# EAGLE board ADK_MEGA_2560-REV3 (EAGLE 7.3.0)
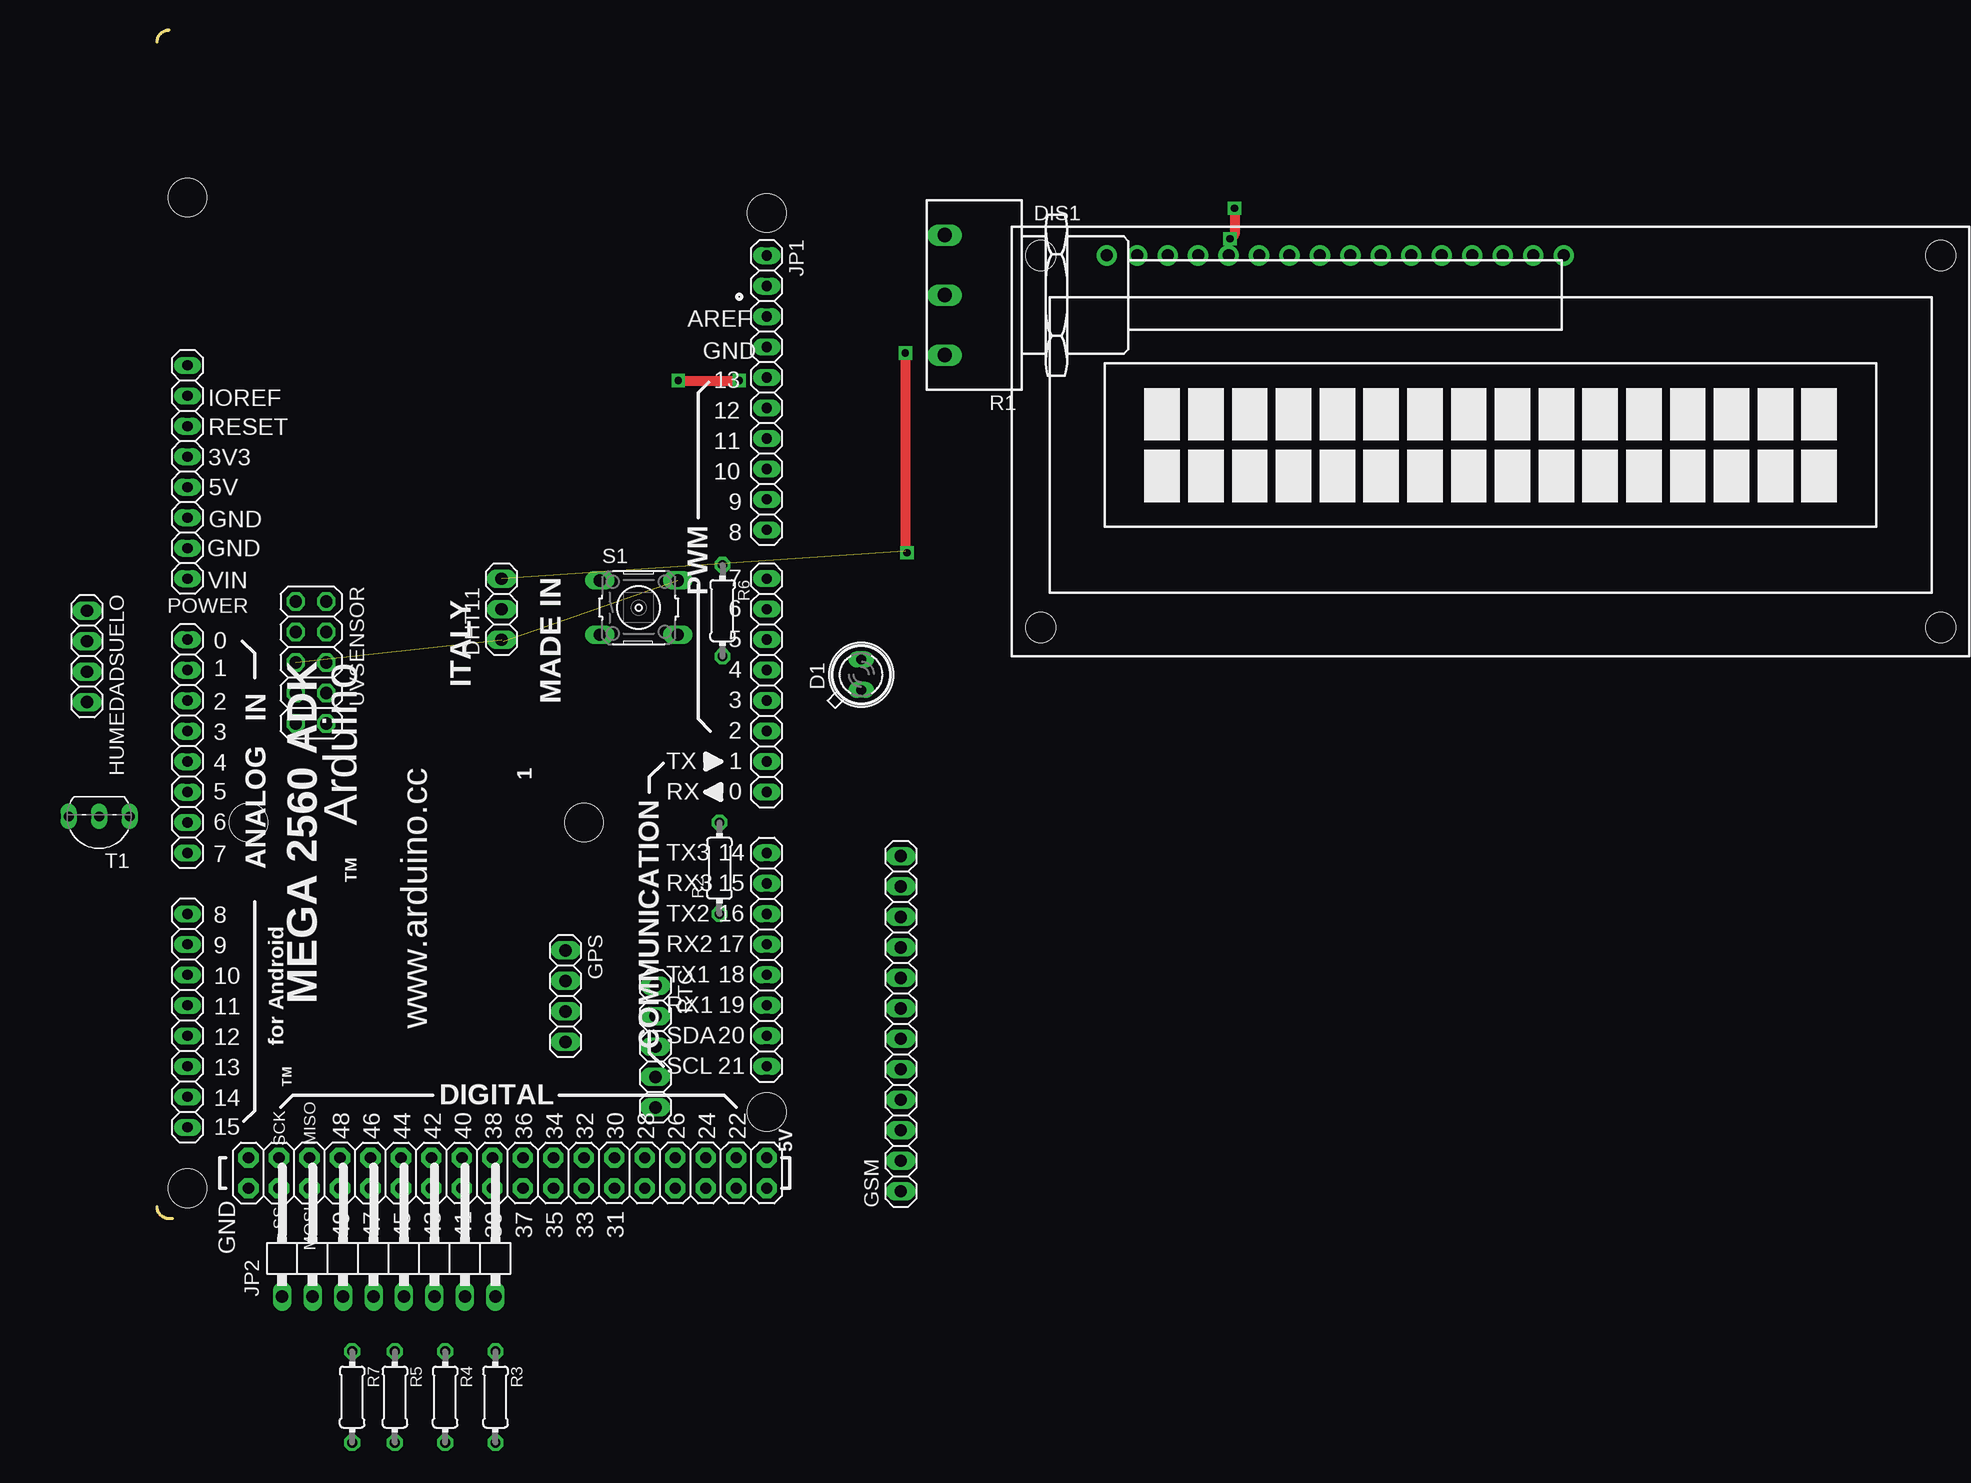
[diagram p0: board, top side]
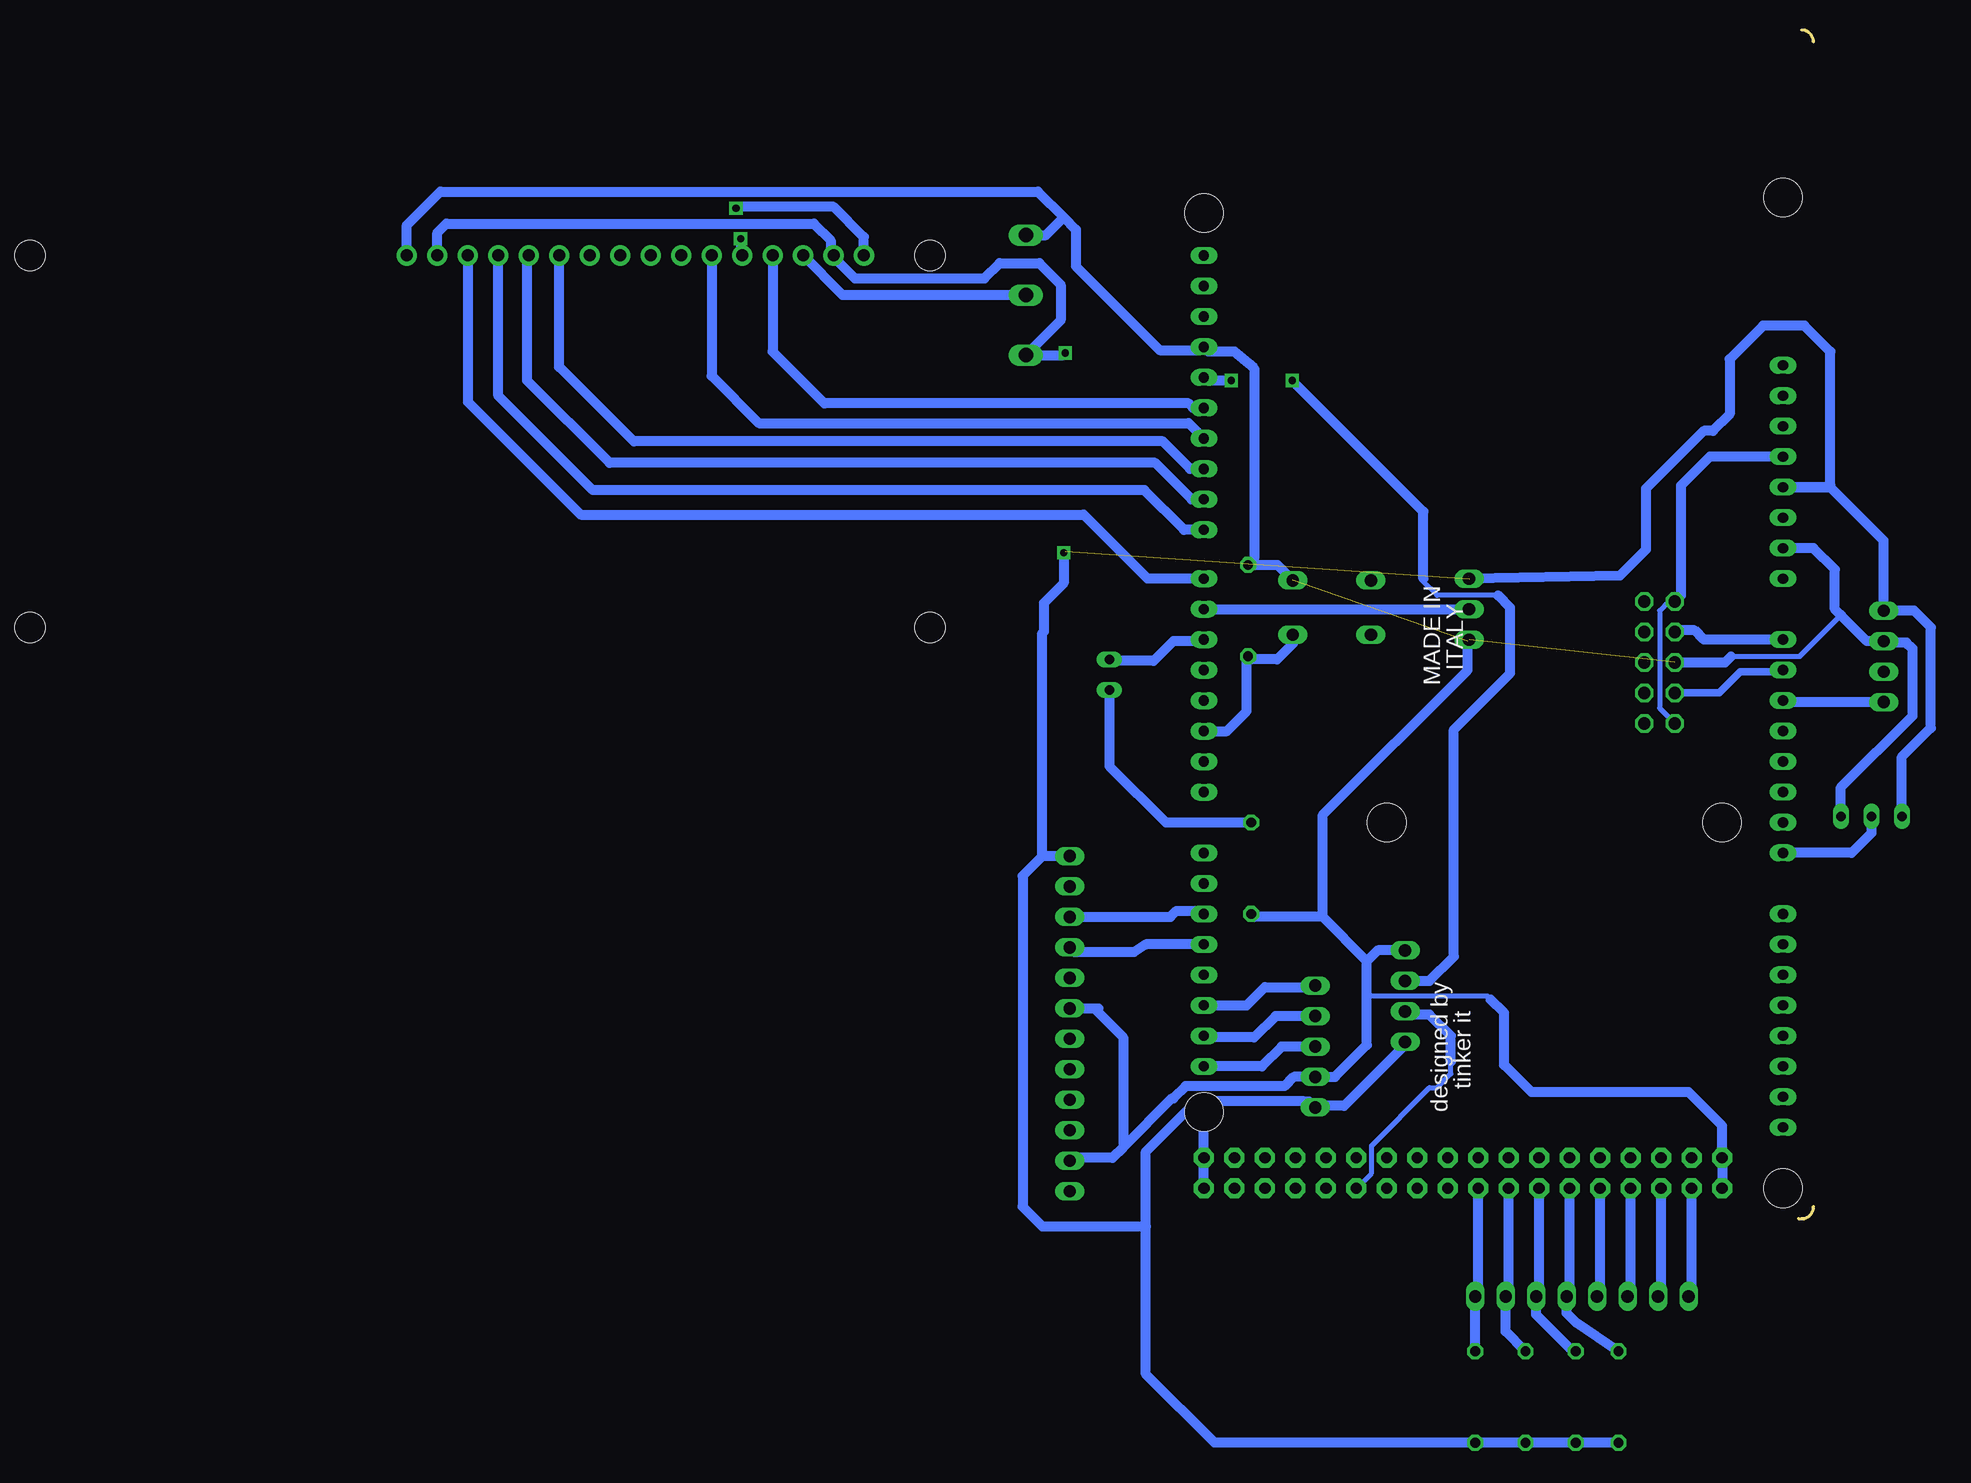
[diagram p1: board, bottom side, seen from below]

Size 1.27 x 99.06 mm. Coordinates in mm from the lower left corner, seen from the top.
Outline: 1.27,0 1,0 arc-90 0,1
Outline: 0,98.06 arc-90 1,99.06
Copper layers (1*16): Top 0.035mm / dielectric 1.5mm / Bottom 0.035mm
Design rules "ArduinoMegaHOST *": minimum track width 8mil, minimum drill 16mil, track to track 7mil, track to pad 7mil, pad to pad 7mil, via to via 10mil, smd to smd 7mil, copper to edge 20mil, drill to drill 12mil, minimum pad ring 10mil, minimum via ring 10mil, stop-mask expansion 2mil, vias tented up to drill 20mil, thermal gap 10mil
Net classes: 0 default: width 0.203 mm, drill 0.406 mm, clearance 0.178 mm; 1 power: width 0.305 mm, drill 0.406 mm, clearance 0.178 mm; 2 gnd: width 0.305 mm, drill 0.406 mm, clearance 0.178 mm; 3 power usb: width 0.508 mm, drill 0.406 mm, clearance 0.178 mm
Holes 3.2 mm at 2.54,2.54 50.8,83.82 50.8,8.89 2.54,85.09 35.56,33.02 7.62,33.02

## Footprints (pad centres in the part's own frame; a part is rotated, then mirrored left to right if it is on the bottom)
1X08 = drill 0.85 pad 1.422 long: 1 -8.89,0; 2 -6.35,0; 3 -3.81,0; 4 -1.27,0; 5 1.27,0; 6 3.81,0; 7 6.35,0; 8 8.89,0
SFH482 = drill 0.813 long: A -1.27,0; K 1.27,0
1X03 = drill 1.016 long: 1 -2.54,0; 2 0,0; 3 2.54,0
TUXGR_16X2_R2 = drill 1 pad 1.676: 1 -32,15.5; 2 -29.46,15.5; 3 -26.92,15.5; 4 -24.38,15.5; 5 -21.84,15.5; 6 -19.3,15.5; 7 -16.76,15.5; 8 -14.22,15.5; 9 -11.68,15.5; 10 -9.14,15.5; 11 -6.6,15.5; 12 -4.06,15.5; 13 -1.52,15.5; 14 1.02,15.5; 15 3.56,15.5; 16 6.1,15.5 | hole 2.5: -37.5,-15.5; 37.5,-15.5; -37.5,15.5; 37.5,15.5
1X04 = drill 1.016 long: 1 -3.81,0; 2 -1.27,0; 3 1.27,0; 4 3.81,0
1X12 = drill 1.016 long: 1 -13.97,0; 2 -11.43,0; 3 -8.89,0; 4 -6.35,0; 5 -3.81,0; 6 -1.27,0; 7 1.27,0; 8 3.81,0; 9 6.35,0; 10 8.89,0; 11 11.43,0; 12 13.97,0
1X10 = drill 0.85 pad 1.422 long: 1 -11.43,0; 2 -8.89,0; 3 -6.35,0; 4 -3.81,0; 5 -1.27,0; 6 1.27,0; 7 3.81,0; 8 6.35,0; 9 8.89,0; 10 11.43,0
1X08/90 = drill 1.016 long: 1 -8.89,-3.81; 2 -6.35,-3.81; 3 -3.81,-3.81; 4 -1.27,-3.81; 5 1.27,-3.81; 6 3.81,-3.81; 7 6.35,-3.81; 8 8.89,-3.81
PC16S = drill 1.2 long: 1A -5,6.5; 1E 5,6.5; 1S 0,6.5
0204/7 = drill 0.813 octagon: 1 -3.81,0; 2 3.81,0
1X05 = drill 1.016 long: 1 -5.08,0; 2 -2.54,0; 3 0,0; 4 2.54,0; 5 5.08,0
B3F-10XX = drill 1.016 long: 1 -3.251,2.261; 2 3.251,2.261; 3 -3.251,-2.261; 4 3.251,-2.261
TO92-EBC = drill 0.813 long: B 0,-1.27; C 2.54,-1.27; E -2.54,-1.27
2X05 = drill 1.016 octagon: 1 -5.08,-1.27; 2 -5.08,1.27; 3 -2.54,-1.27; 4 -2.54,1.27; 5 0,-1.27; 6 0,1.27; 7 2.54,-1.27; 8 2.54,1.27; 9 5.08,-1.27; 10 5.08,1.27
2X18 = drill 0.95 pad 1.676 octagon: 1 -21.59,-1.27; 2 -21.59,1.27; 3 -19.05,-1.27; 4 -19.05,1.27; 5 -16.51,-1.27; 6 -16.51,1.27; 7 -13.97,-1.27; 8 -13.97,1.27; 9 -11.43,-1.27; 10 -11.43,1.27; 11 -8.89,-1.27; 12 -8.89,1.27; 13 -6.35,-1.27; 14 -6.35,1.27; 15 -3.81,-1.27; 16 -3.81,1.27; 17 -1.27,-1.27; 18 -1.27,1.27; 19 1.27,-1.27; 20 1.27,1.27; 21 3.81,-1.27; 22 3.81,1.27; 23 6.35,-1.27; 24 6.35,1.27; 25 8.89,-1.27; 26 8.89,1.27; 27 11.43,-1.27; 28 11.43,1.27; 29 13.97,-1.27; 30 13.97,1.27; 31 16.51,-1.27; 32 16.51,1.27; 33 19.05,-1.27; 34 19.05,1.27; 35 21.59,-1.27; 36 21.59,1.27

## Placement (x,y rotation side)
ADCH  8x1F-H8.5  [1X08]  2.54,16.51 270 top
ADCL  8x1F-H8.5  [1X08]  2.54,39.37 270 top
COMMUNICATION  8x1F-H8.5  [1X08]  50.8,21.59 90 top  (outside the outline)
D1  SFH482  [SFH482]  58.67,45.34 90 top  (outside the outline)
DHT11  [1X03]  28.7,50.8 90 top  (outside the outline)
DIS1  TUXGR_16X2_R2  [TUXGR_16X2_R2]  111.12,64.77 0 top  (outside the outline)
GPS  [1X04]  34.04,18.54 270 top  (outside the outline)
GSM  [1X12]  61.98,16.26 90 top  (outside the outline)
HUMEDADSUELO  [1X04]  -5.84,46.86 270 top  (outside the outline)
JP1  10x1F-H8.5  [1X10]  50.8,68.83 270 top  (outside the outline)
JP2  [1X08/90]  19.3,-2.67 0 top  (outside the outline)
POWER  8x1F-H8.5  [1X08]  2.54,62.23 270 top
PWML  8x1F-H8.5  [1X08]  50.8,44.45 90 top  (outside the outline)
R1  PC16S  [PC16S]  72.14,76.96 90 top  (outside the outline)
R2  [0204/7]  46.86,29.21 90 top  (outside the outline)
R3  [0204/7]  28.19,-14.86 270 top  (outside the outline)
R4  [0204/7]  24,-14.86 270 top  (outside the outline)
R5  [0204/7]  19.81,-14.86 270 top  (outside the outline)
R6  [0204/7]  47.12,50.67 270 top  (outside the outline)
R7  [0204/7]  16.26,-14.86 270 top  (outside the outline)
RTC  [1X05]  41.53,14.35 270 top  (outside the outline)
S1  [B3F-10XX]  40.13,50.93 0 top  (outside the outline)
T1  [TO92-EBC]  -4.83,32.26 180 top
UVSENSOR  [2X05]  12.83,46.36 270 top  (outside the outline)
XIO  18x2F-H8.5  [2X18]  29.21,3.81 180 top  (outside the outline)

## Library data of the parts
ADCH ADCL COMMUNICATION JP1 POWER PWML XIO = SmartPrj
D1 = led
DHT11 GPS GSM HUMEDADSUELO JP2 RTC UVSENSOR = pinhead
DIS1 = display-lcd; OC_FARNELL: unknown; OC_NEWARK: unknown
R1 = piher; OC_FARNELL: 4452940; OC_NEWARK: unknown
R2-R7 = eagle-ltspice; SPICEMODEL: NONE; SPICEPREFIX: R
S1 = switch-omron; MPN: B3F-1000; OC_FARNELL: 176432; OC_NEWARK: 36M3542
T1 = transistor-neu-to92

## Nets
GND: DHT11.1 DIS1.16 GPS.1 GSM.2 GSM.7 HUMEDADSUELO.2 JP1.4 POWER.7 R1.1E R2.1 R6.1 RTC.4 S1.2 T1.E UVSENSOR.5 XIO.35 XIO.36
N$1: DIS1.3 R1.1S
N$2: D1.K PWML.6
N$3: D1.A R2.2
N$4: DIS1.14 PWML.8
N$5: DIS1.1 DIS1.5
N$6: DIS1.13 JP1.10
N$7: DIS1.12 JP1.9
N$8: DIS1.11 JP1.8
N$9: DIS1.6 JP1.7
N$10: DIS1.4 JP1.6
N$11: GPS.2 JP1.5
N$12: DHT11.2 PWML.7
N$13: GPS.3 XIO.12
N$14: COMMUNICATION.1 RTC.3
N$15: COMMUNICATION.2 RTC.2
N$16: COMMUNICATION.3 RTC.1
N$17: ADCL.3 HUMEDADSUELO.4
N$18: ADCL.8 T1.B
N$19: ADCL.2 UVSENSOR.7
N$20: ADCL.1 UVSENSOR.3
N$21: PWML.3 R6.2 S1.4
N$22: COMMUNICATION.6 GSM.10
N$23: COMMUNICATION.5 GSM.9
N$24: JP2.8 R3.1 XIO.20
N$25: JP2.7 R4.1 XIO.22
N$26: JP2.6 R5.1 XIO.24
N$27: JP2.5 R7.1 XIO.26
N$28: POWER.4 UVSENSOR.1 UVSENSOR.9
N$30: JP2.4 XIO.28
N$31: JP2.3 XIO.30
N$32: JP2.2 XIO.32
N$33: JP2.1 XIO.34
VCC: DHT11.3 DIS1.2 DIS1.15 GPS.4 GSM.12 HUMEDADSUELO.1 POWER.5 R1.1A R3.2 R4.2 R5.2 R7.2 RTC.5 T1.C XIO.1 XIO.2

## Tracks (layer width: path | path; a pad name or v marks a point on that pad's centre or on a via)
GND  (2 unrouted)
  Bottom 0.406: 6.86,46.86 1.14,46.86 -2.29,50.29 | 26.92,18.29 27.18,18.54 37.08,18.54 37.21,18.67
  Bottom 0.813: 57.53,5.97 53.47,10.03 53.34,10.03 52.32,11.05 44.07,11.05 43.31,11.81 RTC.4 39.88,11.81 37.21,14.48 37.21,18.67 37.21,21.46 | 57.53,5.97 58.42,5.08 61.72,5.08 GSM.2 | GSM.7 59.94,17.53 | 59.94,17.53 57.53,15.11 57.53,5.97 | 59.94,17.53 59.56,17.53 | T1.E -2.29,35.94 -8.25,41.91 -8.25,47.5 -7.75,48.01 -5.97,48.01 HUMEDADSUELO.2 -4.45,48.13 -2.29,50.29 -1.78,50.8 -1.78,54.1 0,55.88 POWER.7 | UVSENSOR.5 7.37,46.36 6.86,46.86 | XIO.36 XIO.35 7.62,7.75 10.41,10.54 23.49,10.54 25.78,12.83 25.78,17.14 26.92,18.29 | 37.21,21.46 40.89,25.15 | 40.89,25.15 46.61,25.15 R2.1 | GPS.1 36.32,22.35 37.21,21.46 | 40.89,25.15 40.89,33.66 28.83,45.72 28.83,48.13 DHT11.1 | S1.2 44.68,54.48 R6.1 46.61,54.99 46.61,70.87 48.26,72.26 50.42,72.26 JP1.4 51.05,72.39 54.48,72.39 61.47,79.38 61.47,82.42 62.48,83.44 | DIS1.16 117.23,82.8 114.43,85.6 64.64,85.6 62.48,83.44 | R1.1E 63.96,81.96 62.48,83.44
N$1
  Bottom 0.813: R1.1S 80.9,76.96 DIS1.3
N$2
  Bottom 0.813: PWML.6 50.93,48.13 53.34,48.13 54.99,46.48 58.55,46.48 D1.K
N$3
  Bottom 0.813: D1.A 58.67,37.72 53.98,33.02 R2.2
N$4
  Bottom 0.813: DIS1.14 112.14,68.08 102.74,58.67 60.83,58.67 55.5,53.34 PWML.8
N$5  (via drill 0.6)
  Top 0.813: v89.79,84.2 89.79,82.04 v89.41,81.66
  Bottom 0.813: DIS1.5 89.41,80.39 v89.41,81.66 | DIS1.1 79.12,81.79 81.66,84.33 89.66,84.33 v89.79,84.2
N$6
  Bottom 0.813: JP1.10 52.45,57.4 55.75,60.71 101.73,60.71 109.6,68.58 DIS1.13
N$7
  Bottom 0.813: JP1.9 51.82,59.94 54.86,62.99 100.33,62.99 107.19,69.85 107.19,80.15 DIS1.12
N$8
  Bottom 0.813: JP1.8 51.94,62.48 54.23,64.77 98.3,64.77 104.52,70.99 DIS1.11
N$9
  Bottom 0.813: DIS1.6 91.83,70.23 87.88,66.29 52.07,66.29 JP1.7
N$10
  Bottom 0.813: JP1.6 51.69,67.56 52.07,67.94 82.42,67.94 86.75,72.27 DIS1.4
N$11  (via drill 0.6)
  Top 0.813: v43.43,69.85 v48.51,69.85
  Bottom 0.406: 26.29,51.94 31.37,51.94 32.51,53.09 32.51,53.34
  Bottom 0.813: GPS.2 32,19.81 29.97,21.84 29.97,40.77 25.27,45.47 25.27,50.93 26.29,51.94 | 32.51,53.34 32.51,58.93 v43.43,69.85 | v48.51,69.85 50.55,69.85 JP1.5
N$12
  Bottom 0.813: PWML.7 DHT11.2
N$13
  Bottom 0.406: XIO.12 36.83,3.81 36.83,6.1 32,10.92 31.37,10.92 30.23,12.07 30.23,13.08
  Bottom 0.813: 30.23,13.08 30.23,15.24 32,17.02 33.78,17.02 GPS.3
N$14
  Bottom 0.813: RTC.3 44.32,14.35 45.97,12.7 COMMUNICATION.1
N$15
  Bottom 0.813: RTC.2 44.83,16.89 46.61,15.11 50.67,15.11 COMMUNICATION.2
N$16
  Bottom 0.813: COMMUNICATION.3 47.24,17.78 45.72,19.3 41.66,19.3 RTC.1
N$17
  Bottom 0.813: HUMEDADSUELO.4 2.41,43.05 ADCL.3
N$18
  Bottom 0.813: T1.B -4.83,32.13 -3.17,30.48 ADCL.8
N$19
  Bottom 0.61: UVSENSOR.7 7.87,43.81 6.1,45.59 2.67,45.59 ADCL.2
N$20
  Bottom 0.813: ADCL.1 9.14,48.26 9.91,49.02 11.43,49.02 UVSENSOR.3
N$21
  Bottom 0.813: PWML.3 48.9,40.64 47.24,42.29 47.24,46.74 R6.2 46.86,46.61 44.7,46.61 43.38,47.93 S1.4
N$22
  Bottom 0.813: GSM.10 53.59,25.15 53.09,25.65 51.05,25.65 COMMUNICATION.6
N$23
  Bottom 0.813: COMMUNICATION.5 55.63,22.86 56.64,22.23 61.59,22.23 GSM.9
N$24
  Bottom 0.813: R3.1 JP2.8 27.94,-6.22 XIO.20
N$25
  Bottom 0.813: R4.1 25.65,-9.4 JP2.7 25.4,-6.22 XIO.22
N$26
  Bottom 0.813: R5.1 20.07,-11.05 23.11,-8 JP2.6 22.86,-6.22 XIO.24
N$27
  Bottom 0.813: R7.1 19.81,-8.64 20.57,-7.87 JP2.5 20.32,-6.22 XIO.26
N$28
  Bottom 0.406: UVSENSOR.1 12.07,51.44 12.83,50.67 12.83,42.55 UVSENSOR.9
  Bottom 0.813: POWER.4 8.64,63.5 11.05,61.09 11.05,51.94 UVSENSOR.1
N$30
  Bottom 0.813: JP2.4 17.78,-6.22 XIO.28
N$31
  Bottom 0.813: JP2.3 15.24,-6.22 XIO.30
N$32
  Bottom 0.813: JP2.2 12.7,-6.22 XIO.32
N$33
  Bottom 0.813: JP2.1 10.16,-6.22 XIO.34
VCC  (via drill 0.6)  (1 unrouted)
  Top 0.813: v62.36,72.14 62.36,55.63 v62.48,55.5
  Bottom 0.813: R7.2 R5.2 R4.2 R3.2 49.91,-18.67 55.63,-12.95 55.63,-0.63 | 55.63,-0.63 55.63,5.59 51.69,9.53 | 51.69,9.53 51.44,9.78 51.31,9.78 | 42.42,9.78 42.04,9.78 RTC.5 | RTC.5 41.91,9.27 42.42,9.78 | 42.42,9.78 51.31,9.78 | 51.31,9.78 51.56,9.53 | 51.56,9.53 51.69,9.53 | GSM.12 64.26,30.23 | 64.26,30.23 65.91,28.57 65.91,1.02 64.26,-0.63 55.63,-0.63 | 64.26,30.23 64.26,48.83 64.14,48.95 64.14,51.31 62.48,52.96 v62.48,55.5 | T1.C -7.37,38.48 -9.78,40.89 -9.78,49.28 -8.38,50.67 HUMEDADSUELO.1 -5.84,56.52 -1.4,60.96 POWER.5 -1.27,60.96 -1.4,61.09 -1.4,72.26 0.76,74.42 4.19,74.42 6.99,71.63 6.99,67.06 8.38,65.66 9.14,65.66 13.97,60.83 13.97,55.75 16.13,53.59 DHT11.3 | GPS.4 34.04,14.48 39.12,9.4 41.4,9.4 RTC.5 | DIS1.15 114.69,82.16 113.92,82.93 83.31,82.93 81.92,81.53 81.92,80.52 DIS1.2 81.67,80.14 79.88,78.36 69.09,78.36 67.82,79.63 64.52,79.63 62.74,77.85 62.74,74.86 R1.1A 62.53,71.96 v62.36,72.14 | XIO.2 XIO.1 50.8,8.76 51.56,9.53

## Text on the board
tNames: AREF | GND | 13 | IOREF | 12 | RESET | 11 | 3V3 | 10 | 5V | 9 | GND | PWM | 8 | GND | MADE IN | 7 | VIN | ITALY | 6 | 5 | 0 | MEGA 2560 ADK | Arduino | 1 | 4 | ANALOG IN | 2 | 3 | 3 | 2 | www.arduino.cc | 4 | 1 | TX | 1 | 5 | RX | 0 | 6 | 7 | TM | TX3 | 14 | RX3 | 15 | 8 | TX2 | 16 | for Android | 9 | RX2 | 17 | TX1 | 18 | 10 | 11 | RX1 | 19 | SDA | 20 | 12 | TM | 13 | SCL | 21 | MISO | 14 | SCK | 48 | 46 | 44 | 42 | DIGITAL | 40 | 38 | 36 | 34 | 32 | 30 | 28 | 26 | 24 | 22 | 15 | 5V | GND | SS | MOSI | 49 | 47 | 45 | 43 | 41 | 39 | 37 | 35 | 33 | 31
bNames: ITALY | MADE IN | tinker it | designed by